# Altium PCB usb_io_v3_brd.PcbDoc
Units mil, origin at the board's own origin, x right, y up, seen from the top; angles counter-clockwise.
Board outline 1476 x 1324 mil, 2 copper layers (Top Layer, Bottom Layer), stack 62.249 mil thick; 45 components, 23 nets, 133 pads, 100 vias.
Unrouted connection lines stored in the file: 2.
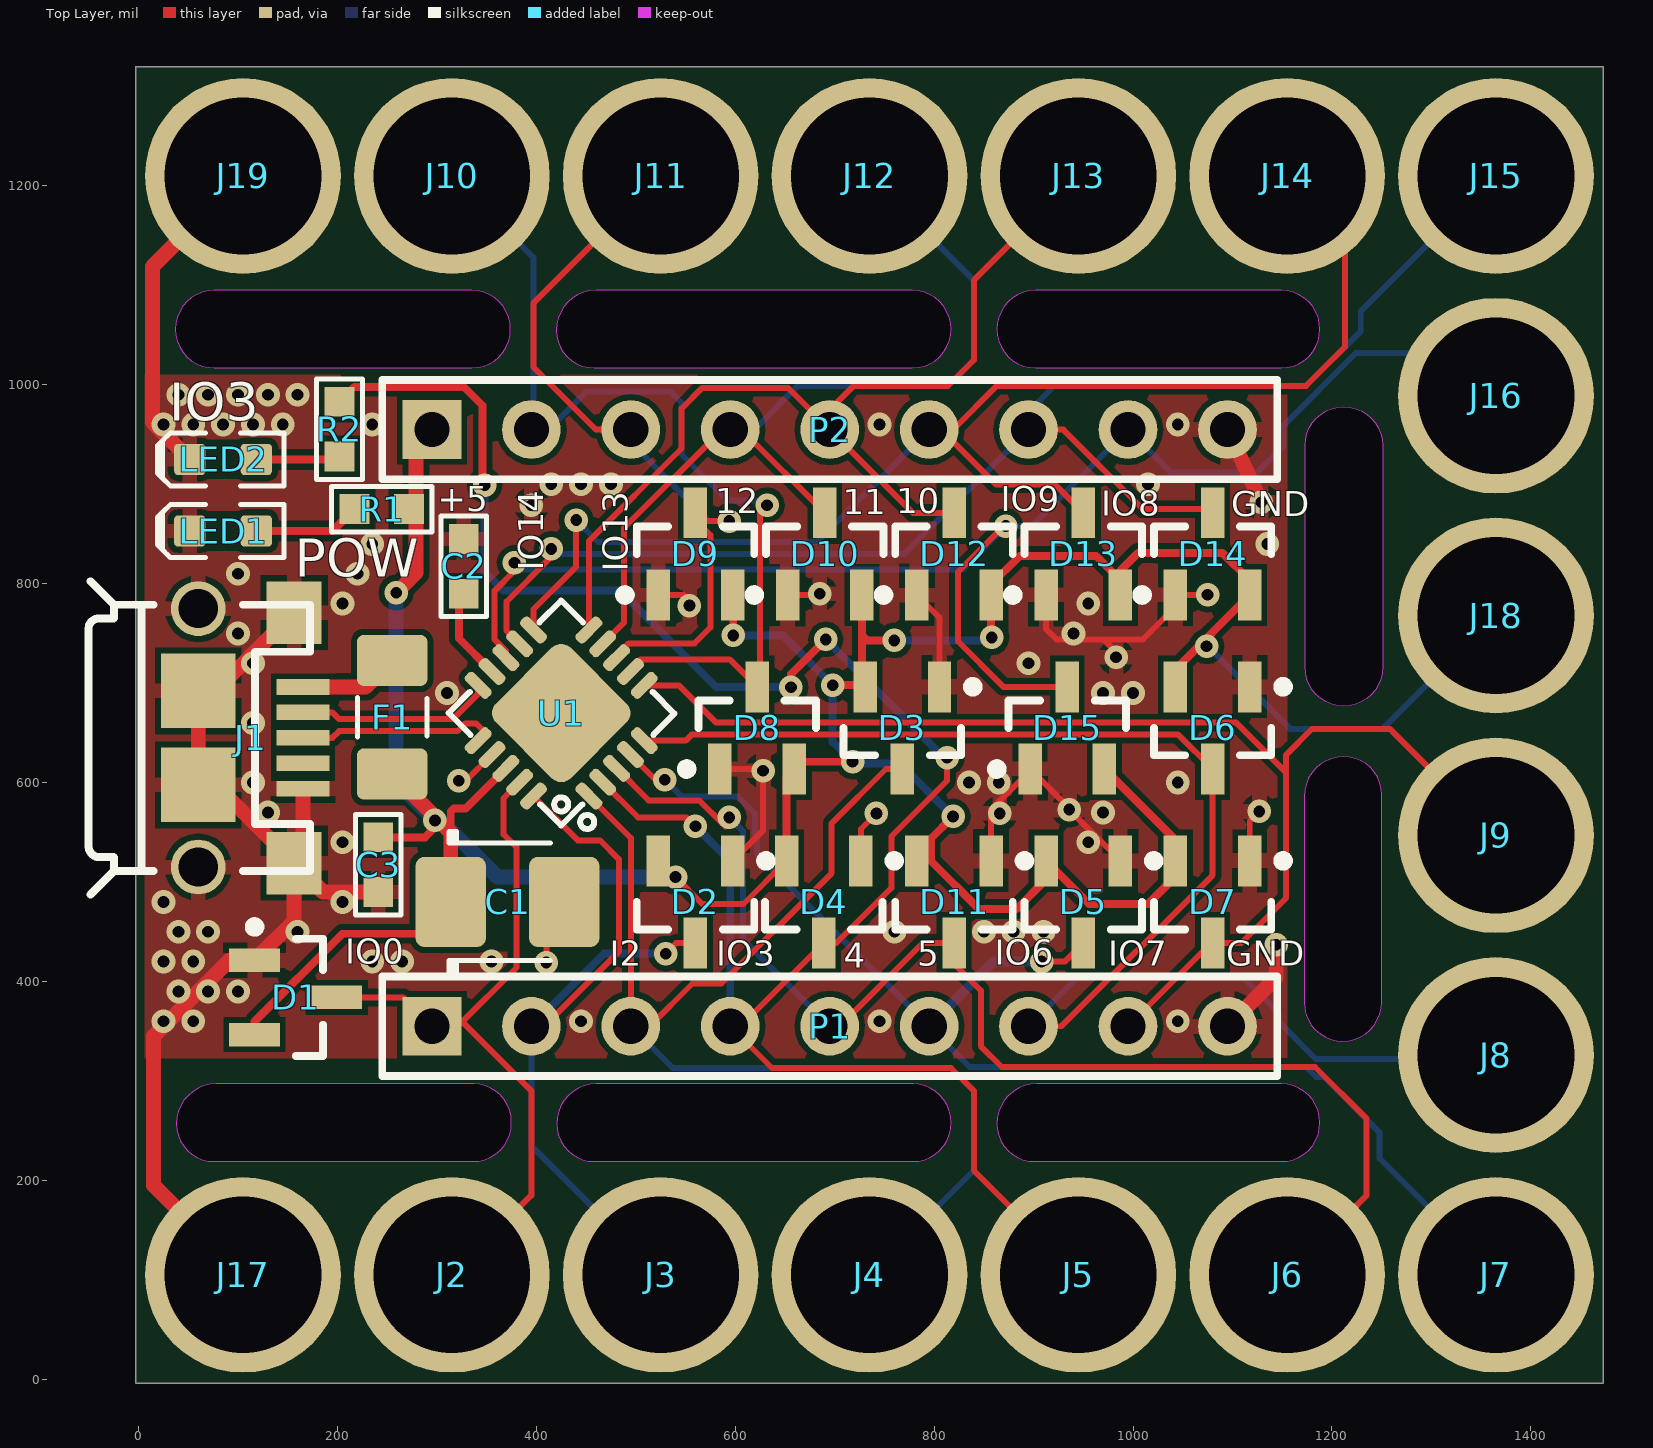
[diagram p0: Top Layer view]
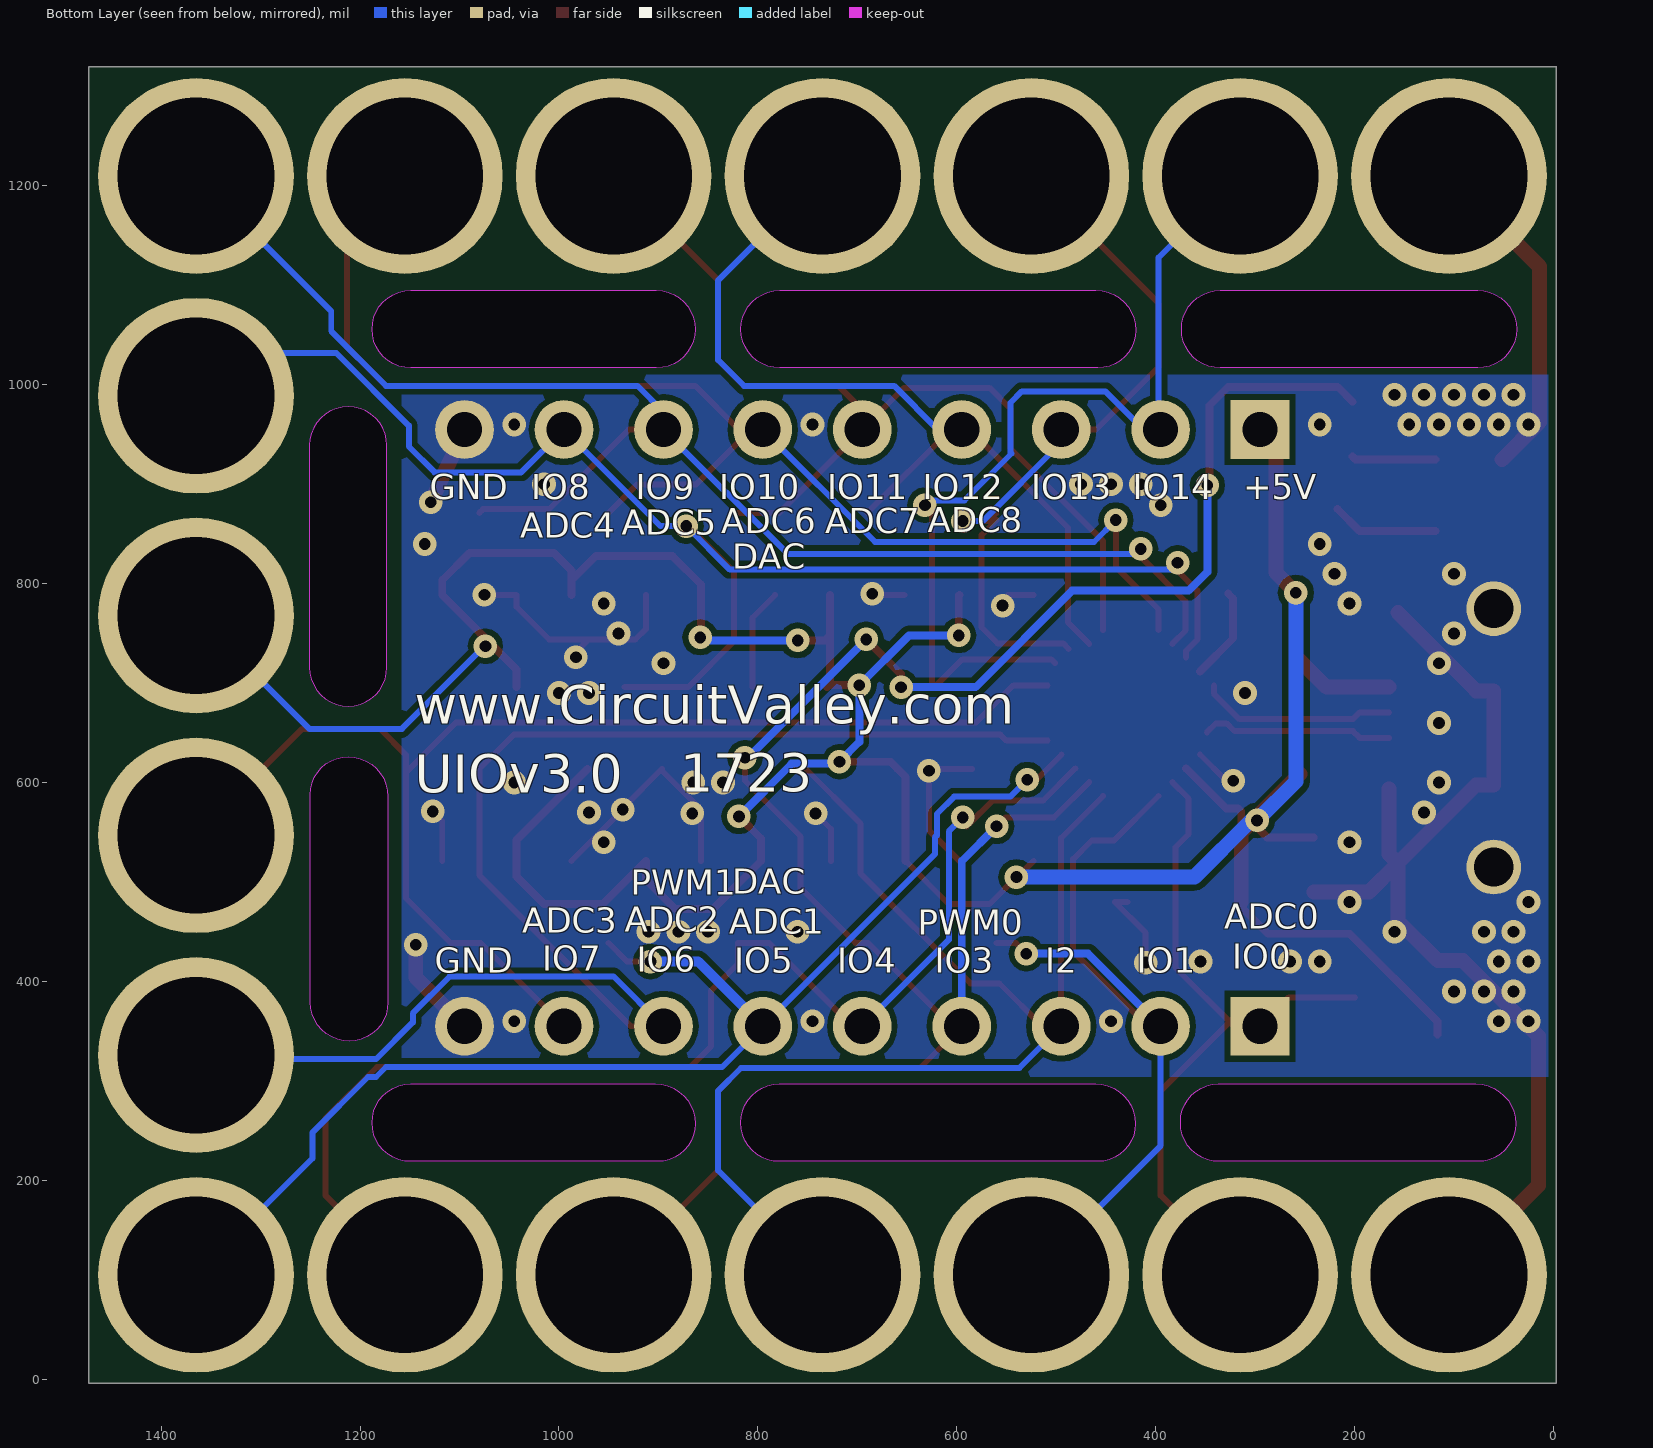
[diagram p1: Bottom Layer view, seen from below]

## Layer stack, top to bottom
Top Solder: solder mask 0.4, Solder Resist, Dk 3.5
Top Layer: signal copper 1.4
Dielectric 1: dielectric 59.4488, FR-4, Dk 4.8
Bottom Layer: signal copper 1.4
Bottom Solder: solder mask 0.4, Solder Resist, Dk 3.5

## Board outline
-3,-4 -3,1320 1473,1320 1473,-4
cut-out: 460,1095 ccw(c460,1055) 420,1055 ccw(c458,1055) 458,1017 778,1017 ccw(c778,1056) 817,1056 ccw(c778,1056) 778,1095
cut-out: 460.33,297 ccw(c460.33,257) 420.33,257 ccw(c458.33,257) 458.33,219 778.33,219 ccw(c778.33,258) 817.33,258 ccw(c778.33,258) 778.33,297
cut-out: 902,1095 ccw(c902,1056) 863,1056 ccw(c902,1056) 902,1017 1149,1017 ccw(c1149,1056) 1188,1056 ccw(c1149,1056) 1149,1095
cut-out: 1149,219 ccw(c1149,258) 1188,258 ccw(c1149,258) 1149,297 903,297 ccw(c903,257) 863,257 ccw(c901,257) 901,219
cut-out: 1250,588 ccw(c1212,588) 1212,626 ccw(c1212,586) 1172,586 1172,379 ccw(c1211,379) 1211,340 ccw(c1211,379) 1250,379
cut-out: 1251,716 cw(c1212,716) 1212,677 cw(c1212,716) 1173,716 1173,939 cw(c1212,939) 1212,978 cw(c1212,939) 1251,939
cut-out: 78,297 ccw(c78,257) 38,257 ccw(c76,257) 76,219 336,219 ccw(c336,258) 375,258 375,259 ccw(c337,259) 337,297
cut-out: 76,1095 ccw(c76,1056) 37,1056 ccw(c76,1056) 76,1017 335,1017 ccw(c335,1056) 374,1056 ccw(c335,1056) 335,1095

## Design rules (kind name [scope] priority, off if disabled: settings)
Clearance [All] p1: gap=6
ComponentClearance [All] p1: gap=10 collisioncheckmode=3 verticalgap=6 showdistances=FALSE
DiffPairsRouting [All] p1: maxlimit=10 minlimit=6 mostfreqgap=6 toplayer_minwidth=6 toplayer_maxwidth=25 toplayer_prefwidth=8 bottomlayer_minwidth=6 bottomlayer_maxwidth=25 bottomlayer_prefwidth=8 maxuncoupledlength=500
PolygonConnect [All] p1: connectstyle=Relief reliefconductorwidth=15 reliefentries=4 polygonreliefangle="90 Angle" airgapwidth=6
RoutingVias [All] p1: holewidth=11.81 width=15.75 viastyle="Through Hole" minholewidth=11.81 minwidth=11.81 maxholewidth=196.85 maxwidth=196.85
SolderMaskExpansion [All] p1: expansion=4
Width [All] p1: maxlimit=250 minlimit=6 preferedwidth=8
28 further rules are at their usual default settings.

## Classes and differential pairs
differential pair USB: +USB_P -USB_N

## Components (designator, comment, footprint, x,y, rotation, side; value= is the part's Value field where it differs from the comment)
C1 "10µ" CAPMP3528X210N 371,480 r0 top
C2 "0.47uf" 0603C-GENERIC 327,845 r270 top
C3 "0.1uf" 0603C-GENERIC 241,490 r90 top
D1 "BAT54S" SOT23_N 158,384 r0 top
D2 "BAT54S" SOT23_N 560,480 r270 top
D3 "BAT54S" SOT23_N 768,655 r270 top
D4 "BAT54S" SOT23_N 689,480 r270 top
D5 "BAT54S" SOT23_N 950,480 r270 top
D6 "BAT54S" SOT23_N 1080,655 r270 top
D7 "BAT54S" SOT23_N 1080,480 r270 top
D8 "BAT54S" SOT23_N 622,655 r90 top
D9 "BAT54S" SOT23_N 560,830 r90 top
D10 "BAT54S" SOT23_N 690,830 r90 top
D11 "BAT54S" SOT23_N 820,480 r270 top
D12 "BAT54S" SOT23_N 820,830 r90 top
D13 "BAT54S" SOT23_N 950,830 r90 top
D14 "BAT54S" SOT23_N 1080,830 r90 top
D15 "BAT54S" SOT23_N 933.9,655 r90 top
F1 "0ZCJ0050FF2G" RESC3216N 255,665.8 r270 top
J1 "Micro-USB-B" 10118193-0001lfc 60,645 r270 top
J2 "4mm" header_4mm_drill 315,105 r180 top
J3 "4mm" header_4mm_drill 525,105 r0 top
J4 "4mm" header_4mm_drill 735,105 r0 top
J5 "4mm" header_4mm_drill 945,105 r0 top
J6 "4mm" header_4mm_drill 1155,105 r0 top
J7 "4mm" header_4mm_drill 1365,105 r0 top
J8 "4mm" header_4mm_drill 1365,326 r90 top
J9 "4mm" header_4mm_drill 1365,547 r90 top
J10 "4mm" header_4mm_drill 315,1210 r180 top
J11 "4mm" header_4mm_drill 525,1210 r0 top
J12 "4mm" header_4mm_drill 735,1210 r0 top
J13 "4mm" header_4mm_drill 945,1210 r0 top
J14 "4mm" header_4mm_drill 1155,1210 r0 top
J15 "4mm" header_4mm_drill 1365,1210 r0 top
J16 "4mm" header_4mm_drill 1365,989 r0 top
J17 "4mm" header_4mm_drill 105,105 r0 top
J18 "4mm" header_4mm_drill 1365,768 r90 top
J19 "4mm" header_4mm_drill 105,1210 r0 top
LED1 "Yellow" LED-0603-YELLOW 85,853 r180 top
LED2 "Yellow" LED-0603-YELLOW 85,925 r180 top
P1 "Header 9" HDR1X9 295,355 r0 top
P2 "Header 9" HDR1X9 295,955 r0 top
R1 "330R" 0603R-2K2 217,875 r0 top
R2 "330R" 0603R-2K2 202,928 r90 top
U1 "PIC16(L)F1459-I/GZ" UQFN20_4x4 425,670 r135 top

## Footprints (in the part's own frame and the unit in brackets; to place one, negate y for a bottom-side part, rotate by r counter-clockwise, add the part's x,y. Pads: shape width x height; smd on the part's side, far side on the other; paste and mask are expansions set on the pad)
0603C-GENERIC [mil] "CAPACITOR 0603"
  rect 30x30 smd: 1(0,0) 2(55,0)
  silkscreen extent -23,-23 78,23, body extent -4,-15 59,15, height 19
0603R-2K2 [mil] "RESISTOR 0603"
  rect 30x30 smd: 1(0,0) 2(55,0)
  silkscreen extent -23,-23 78,23, body extent -4,-15 59,15, height 20
10118193-0001lfc [mm]
  rect 0.4x1.35 smd: 1(-1.3,2.675) 2(-0.65,2.675) 3(0,2.675) 4(0.65,2.675) 5(1.3,2.675)
  round 1.4 hole 1: 6(-3.3,0) 9(3.3,0)
  rect 1.6x1.4 smd: 6(-3.2,2.45) 9(3.2,2.45)
  rect 1.9x1.9 smd: 7(-1.2,0) 8(1.2,0)
  silkscreen extent -4,-2.8 4,2.85, body extent -3.93,-2.76 3.93,2.9, height 2.81
CAPMP3528X210N [mm] "Molded body capacitor, Body 3.5x2.8mm, 1210, IPC Nominal settings"
  round 0.254 on Mech14: 0(0,0)
  rrect25% 1.8x2.3 smd: 1(-1.45,0) 2(1.45,0)
  Top Layer pour cut-out: -0.508,1.27 0.508,1.27 0.508,-1.27 -0.508,-1.27
  silkscreen extent -1.5,-1.8 1.1,1.8, body extent -1.75,-1.4 1.75,1.4, height 2.1
HDR1X9 [mm] "Connector; Header; 9 Position"
  rect 1.5x1.5 hole 0.9: 1(0,0)
  round 1.5 hole 0.9: 2(2.54,0) 3(5.08,0) 4(7.62,0) 5(10.16,0) 6(12.7,0) 7(15.24,0) 8(17.78,0) 9(20.32,0)
  silkscreen extent -1.27,-1.27 21.59,1.27
header_4mm_drill [mm]
  round 5 hole 4: 1(0,0)
LED-0603-YELLOW [mm]
  round 0.254 on Mech14: 0(0,0)
  rrect25% 0.8x0.8 smd: A(-0.85,0) K(0.85,0)
  Top Layer pour cut-out: -0.5,0.5 0.5,0.5 0.5,-0.5 -0.5,-0.5
  silkscreen extent -1.55,-0.67 1.68,0.67, body extent -0.8,-0.4 0.8,0.4, height 0.75
RESC3216N [mm] "Chip Resistor, Body 3.2x1.6mm, 1206, IPC Medium Density"
  round 0.508 on Mech14: 0(0,0)
  rrect25% 1.3x1.8 smd: 1(-1.45,0) 2(1.45,0)
  silkscreen extent -0.51,-0.89 0.51,0.89, body extent -1.62,-0.82 1.63,0.83, height 0.69
SOT23_N [mm] "SOT23, 3-Leads, Body 2.9x1.3mm, Pitch 0.95mm, Lead Span 2.3mm, IPC Medium Density"
  rect 1.3x0.6 smd: 1(-1.05,0.95) 2(-1.05,-0.95) 3(1.05,0)
  silkscreen extent -1.17,-1.5 0.7,1.92, body extent -0.7,-1.5 0.7,1.5, height 1.1
UQFN20_4x4 [mm]
  rrect70% 0.8x0.3 smd: 1(-2,1) 2(-2,0.5) 3(-2,0) 4(-2,-0.5) 5(-2,-1) 11(2,-1) 12(2,-0.5) 13(2,0) 14(2,0.5) 15(2,1)
  rrect70% 0.3x0.8 smd: 6(-1,-2) 7(-0.5,-2) 8(0,-2) 9(0.5,-2) 10(1,-2) 16(1,2) 17(0.5,2) 18(0,2) 19(-0.5,2) 20(-1,2)
  rrect25% 2.7x2.7 smd: 21(0,0)
  silkscreen extent -2.62,-2.03 2.03,2.03, body extent -2.02,-2.02 2.02,2.02, height 0.81

## Part data
C1: library part CAPT_47u_1210_6V3, "Capacitor SMD Tantalum 47uF 20% 6.3V 1210"
C2 C3: library part 0603C-10UF-6V3-X5R-MUR, "CAPACITOR 0603 CERAMIC"
D1 D2 D3 D4 D5 D6 D7 D8 D9 D10 D11 D12 D13 D14 D15: "Schottky Barrier Double Diode"
F1: library part FUSE-GENERIC, "GENERIC FUSE"
J2 J3 J4 J5 J6 J7 J8 J9 J10 J11 J12 J13 J14 J15 J16 J17 J18 J19: library part Banana_4mm
LED1 LED2: library part LED_SMD_Yellow_0603_150mcd, "LED 0603 SMD Yellow 590nm 150mcd 20mA"
P1 P2: "Header, 9-Pin"
R1 R2: library part 0603R-2K2, "GENERIC RESISTOR 0603"

## Via types
v1: diameter 24, hole 12, Top Layer to Bottom Layer, tented both sides, 61 vias
v2: diameter 23.62, hole 11.81, Top Layer to Bottom Layer, tented both sides, 39 vias

## Nets (pads, with @x,y where several pads share a name; then routed paths per layer and width w, separated by ;. In a path a pad name is that pad's centre, name@x,y a point inside that pad or via, vN(x,y) a via of type N, cw(c..) or ccw(c..) an arc to the next point about the centre after c; other vN are vias at no path point)
+5V: C1.1 C3.2 D1.2 D2.2 D3.2 D4.2 D5.2 D6.2 D7.2 D8.2 D9.2 D10.2 D11.2 D12.2 D13.2 D14.2 D15.2 F1.2 J18.1 P2.1 R1.2 U1.18 | length 3627.3
  Top Layer w6: D2.2 538.94,505 v2(540,505) 567,478 608.26,478 D4.2
  Top Layer w8: D1.2 116.66,359.66 205,448 287,448 313.91,474.91 C1.1 ; C3.2 288,545 v2@303.35,560.35 ; 313.91,549.8 313.91,570.91 317,574 329,574 U1.18 ; D9.2 598,788.06 v2(598,748) ; D4.2 651.6,605.86 D8.2 666.74,621 v2(718,621) ; v2(698,698) D3.2@728.94,698 ; D10.2 727.4,748 ; D3.2 D3.2@728.94,698 ; v2(760,743) 732.4,743 727.4,748 ; v2(819,566) 796.66,543.66 796.66,521.34 845,473 883,473 912.6,502.6 D5.2 955.94,478 1015,478 1042.6,505.6 D7.2 1042.6,542.36 D15.2 ; v2(858,746) 857.4,746.6 D12.2 857.4,799.4 886,828 963,828 D13.2@987.4,803.6 ; D13.2 D13.2@987.4,803.6 ; D6.2 1042.6,713.86 D14.2 1117.4,803.6 1090,831 1005,831 987.4,813.4 D13.2@987.4,803.6 ; 727.4,748 727.4,699.54 D3.2@728.94,698
  Top Layer w15: F1.2 303.35,560.35 313.91,549.8 C1.1 ; v2(259,791) 279,811 279,939 P2.1
  Bottom Layer w6: v2(1074,737) 1075,737 1158,654 1251,654 J18.1
  Bottom Layer w8: v2(598,748) 648,748 v2(698,698) 698,641 v2(718,621) ; v2@718,619 766,619 v2(819,566) ; v2(760,743) 855,743 v2(858,746)
  Bottom Layer w15: v2(259,791) 259,601 v2(298,562) 304,562 361,505 v2(540,505)
GND: C1.2 C2.1 C3.1 D1.1 D2.1 D3.1 D4.1 D5.1 D6.1 D7.1 D8.1 D9.1 D10.1 D11.1 D12.1 D13.1 D14.1 D15.1 J1.5 J1.6 J1.7 J1.8 J1.9 J17.1 J19.1 LED1.K LED2.K P1.9 P2.9 U1.17 | length 2625.2
  Top Layer w6: v2(322,602) 329.16,602 U1.17 ; v2@395,878 v2(395,879) ; v2(410,419) 410,449 441,480 C1.2 ; D9.1 548.34,788.66 554,783 v2(554,778) ; D8.1 628,613.66 v2(628,612) 628,551.94 D2.1 ; D10.1 683.66,788.66 v2(685,790) ; D4.1 726.4,553.4 v2(742,569) ; D12.1 805.4,765.86 D3.1 ; D11.1 v2@857.4,569 ; v2@857.4,573.15 861.85,573.15 v2(866,569) ; v2@859.62,575.38 D15.1@896.49,612.25 ; D15.1 935.87,574.28 v2(935.87,572.87) D5.1 ; D13.1 912.6,754.4 923,744 970,744 ; v2(983,726) 983,731 970,744 ; v2(1075,789) 1074.66,788.66 D14.1 1042.6,776.6 1010,744 970,744 ; D7.1 1117.4,561.4 v2(1127,571)
  Top Layer w15: LED2.K 14,962.54 14,1119 J19.1 ; J17.1 15,195 15,345 91,421 116.26,421 D1.1 156.46,461.2 J1.9@156.46,519.02 ; J1.6@156.46,770.98 77.72,692.24 J1.7 J1.8 77.72,597.76 J1.9@156.46,519.02 ; J1.5 165.32,527.87 J1.9@156.46,519.02 ; C3.1 185.47,490 J1.9@156.46,519.02 ; P1.9 1144,404 v2(1144,437) ; P2.9 v2(1129,882)
  other v1: 25,360 55,360 445,360 745,360 1045,360 40,390 70,390 100,390 25,420 55,420 235,420 265,420 355,420 40,450 70,450 160,450 760,450 850,450 880,450 910,450 25,480 205,480 205,540 955,540 130,570 970,570 115,600 835,600 865,600 1045,600 115,660 310,690 970,690 1000,690 115,720 895,720 100,750 940,750 205,780 955,780 100,810 220,810 235,840 1135,840 415,900 445,900 475,900 1015,900 25,960 55,960 85,960 115,960 145,960 235,960 745,960 1045,960 40,990 70,990 100,990 130,990 160,990
I2: D3.3 J4.1 P1.3 U1.1 | length 1258.8
  Top Layer w6: U1.1 495,544.32 P1.3 514,355 557,398 586,398 697,509 697,559 751.66,613.66 D3.3
  Bottom Layer w6: P1.3 537,313 817,313 840,290 840,210 J4.1
IO0: D1.3 J2.1 P1.1 U1.19 | length 728
  Top Layer w6: D1.3 266,384 P1.1 ; P1.1@310,355 320,365 395,290 395,185 J2.1 ; P1.1@321,355 380,414 380,535 367,548 367,584.16 U1.19
IO1: D2.3 J3.1 P1.2 U1.20 | length 827.7
  Top Layer w6: P1.2 408,355 483,430 483,523 464,542 441.64,542 U1.20 ; v2(530,428) 540.66,438.66 D2.3
  Bottom Layer w6: P1.2 395,235 J3.1
  Bottom Layer w8: P1.2 468,428 v2(530,428)
IO3: D4.3 J5.1 P1.4 R2.2 U1.2 | length 2117.1
  Top Layer w6: U1.2 502.16,565 551,565 v2(560,556) ; v2(813,625) 813,601.87 757,545.87 757,494 701.66,438.66 D4.3 605.34,355 P1.4 637,313 817,313 840,290 840,210 J5.1
  Top Layer w8: R2.2 217,998 327,998 346,979 346,901 v2(348,899) ; v2(656,696) 656,709 v2(691,744)
  Bottom Layer w8: v2(348,899) 348,812 367,793 484,793 581,696 v2(656,696) ; v2(560,556) 595,521 P1.4 ; v2(691,744) 810,625 v2(813,625)
IO4: D11.3 J6.1 P1.5 U1.3 | length 1275.4
  Top Layer w6: U1.3 513,582 563.93,582 v2@587.46,558.46 ; v2@590,555.93 594,559.93 v2(594,565) ; P1.5 705,355 788.66,438.66 D11.3 820,418 847,391 847,335 868,314 1183,314 1235,262 1235,185 J6.1
  Bottom Layer w6: v2(594,565) 608,551 608,442 P1.5
IO5: D5.3 J7.1 P1.6 U1.4 | length 1314.5
  Top Layer w6: U1.4 519.84,603 v2(529,603) ; v2(908,420) 931.34,420 D5.3
  Bottom Layer w6: v2(529,603) 546.19,585.81 602.62,585.81 620,568.43 620,547 622,545 622,528 P1.6 836,314 1174,314 1184,304 1192,304 1248,248 1248,222 J7.1
  Bottom Layer w10: P1.6 860,420 v2(908,420)
IO6: D6.3 J8.1 P1.7 U1.5 | length 1475
  Top Layer w6: U1.5 550.16,642.16 556.25,648.25 955.76,648.25 1045.41,648.25 D6.3 1080,507 928,355 P1.7
  Bottom Layer w6: P1.7 945,405 1110,405 1147,368 1147,359 1184,322 1361,322 J8.1
IO7: D7.3 J9.1 P1.8 U1.6 | length 1304.4
  Top Layer w6: U1.6 543.16,697.84 580.75,660.25 1103.75,660.25 1154,610 ; P1.8 1078.66,438.66 D7.3 1108.66,438.66 1154,484 1154,610 ; J9.1 1258,654 1180,654 1154,628 1154,610
IO8: D15.3 J16.1 P2.8 U1.13 | length 1520
  Top Layer w6: U1.13 369.32,732.44 358,743.76 358,793 378,813 v2(378,821) ; v2(872,858) 870,858 824,812 824,742 869.66,696.34 D15.3
  Bottom Layer w6: v2(378,821) 384.81,814.19 828.19,814.19 v2(872,858) 898,858 P2.8 1038,912 1125,912 1151,938 1151,959.03 1223.99,1032.01 1321.99,1032.01 J16.1
IO9: D14.3 J15.1 P2.7 U1.12 | length 1470.9
  Top Layer w6: U1.12 370,752.84 370,782 415,827 v2(415,835) ; P2.7 930,955 1010,875 1076.34,875 D14.3
  Bottom Layer w6: v2(415,835) 420,830 770,830 P2.7 895,973 921,999 1174,999 1229,1054 1229,1074 J15.1
IO10: D13.3 J14.1 P2.6 U1.11 | length 1365.2
  Top Layer w6: U1.11 397.16,774.16 440,817 v2(440,864) ; P2.6 P2.6@807,955 ; D13.3 921.34,900 862,900 P2.6@807,955 ; J14.1 1213,1152 1213,1038 1174,999 863,999 819,955 P2.6@807,955
  Bottom Layer w6: v2(440,864) 462,842 682,842 P2.6
IO11: D12.3 J13.1 P2.5 U1.10 | length 1010
  Top Layer w6: U1.10 452.84,842.84 546,936 546,976 567,997 653,997 P2.5 ; D12.3 778.66,871.34 P2.5 ; J13.1 840,1105 840,1025 814,999 719,999 695,975 P2.5
IO12: D10.3 J12.1 P2.4 U1.9 | length 928.3
  Top Layer w6: U1.9 488,760.84 488,856 587,955 P2.4 606.34,955 D10.3
  Bottom Layer w6: P2.4@595,932 P2.4 619,955 663,999 814,999 840,1025 840,1105 J12.1
IO13: D9.3 J11.1 P2.3 U1.8 | length 762
  Top Layer w6: U1.8@487.44,734.36 493.08,740 559,740 575,756 575,849 D9.3@560,864 ; P2.3 460,955 397,1018 397,1082 J11.1 ; D9.3 568.34,863 v2(594,863)
  Bottom Layer w6: P2.3 495,942 574,863 v2(594,863)
IO14: D8.3 J10.1 P2.2 U1.7 | length 1000
  Top Layer w6: J10.1@315,1166 J10.1 ; P2.2@385,965 P2.2 ; U1.7@501.36,720.44 504.92,724 594.34,724 D8.3 625,699.34 625,872 v2(632,879)
  Bottom Layer w6: J10.1 397,1128 397,957 P2.2 412,955 450.53,993.53 534.47,993.53 546,982 546,932 545,931 592.19,883.81 627.19,883.81 v2(632,879)
NetC2_2: C2.2 U1.14 | length 94.1
  Top Layer w8: C2.2 322,785 322,745.16 U1.14
NetF1_1: F1.1 J1.1 | length 100.7
  Top Layer w15: J1.1 228.3,696.18 F1.1
NetLED1_A: LED1.A R1.1 | length 107.6
  Top Layer w8: LED1.A 195,853 R1.1
NetLED2_A: LED2.A R2.1 | length 84.8
  Top Layer w8: LED2.A 199,925 R2.1
USB_N: J1.2 U1.15 | length 198
  Top Layer w6: J1.2 194.89,670.59 201.69,663.8 315.8,663.8 341.48,689.48 U1.15
USB_P: J1.3 U1.16 | length 193
  Top Layer w6: J1.3 194.89,645 201.69,651.8 320.77,651.8 328.63,659.65 339.35,659.65 U1.16@348.5,650.5
pads on no net: C1.0 F1.0 J1.4 LED1.0 LED2.0 U1.21

## Polygon pours and split planes (outlines as drawn)
GND on Bottom Layer "Top Layer-No Net" (solid, pour order 2): 5,1010 5,304 19,304 1158,304 1158,1010
GND on Top Layer "Top Layer-No Net" (solid, pour order 4): 6,1010 6,323 1155,323 1155,1010 6,1010

## Silkscreen, mask and mechanical layers (free items; w line width, h text height)
Top Overlay:
  text "IO3" at 31,964 h38
  text "+5" at 301,873 h25
  text "IO9" at 867,873 h25
  text "12" at 580,871 h25
  text "10" at 762,871 h25
  text "11" at 708,870 h25
  text "IO8" at 967.81,868.51 h25
  text "GND" at 1099,868 h25
  text "IO14" at 407,813 h25 r90
  text "IO13" at 492,812 h25 r90
  text "POW" at 157,807 h38
  text "IO0" at 208,418 h25
  text "IO6" at 861,417 h25
  text "I2" at 474,416 h25
  text "IO3" at 581,416 h25
  text "5" at 783,416 h25
  text "IO7" at 975,416 h25
  text "GND" at 1094,416 h25
  text "4" at 709,414 h25
Bottom Overlay:
  text "+5V" at 312,885 h25
  text "IO14" at 423,885 h25
  text "IO13" at 525,885 h25
  text "IO12" at 634,885 h25
  text "IO11" at 730,885 h25
  text "IO10" at 839,885 h25
  text "IO9" at 923,885 h25
  text "IO8" at 1028,885 h25
  text "GND" at 1130,885 h25
  text "ADC8" at 629,852 h25
  text "ADC7" at 732,851 h25
  text "ADC6" at 837,851 h25
  text "ADC5" at 937,849 h25
  text "ADC4" at 1039,846 h25
  text "DAC" at 826,815 h25
  text "www.CircuitValley.com" at 1145,659 h38
  text "1723" at 878,591 h38
  text "UIOv3.0" at 1145,590 h38
  text "DAC" at 826,488 h25
  text "PWM1" at 928,487 h25
  text "ADC0" at 331,453 h25
  text "ADC2" at 934,450 h25
  text "ADC3" at 1037,449 h25
  text "ADC1" at 829,448 h25
  text "PWM0" at 639,447 h25
  text "IO0" at 323,413 h25
  text "IO7" at 1017,411 h25
  text "IO6" at 922,410 h25
  text "IO1" at 419,409 h25
  text "I2" at 511,409 h25
  text "IO3" at 622,409 h25
  text "IO4" at 720,409 h25
  text "IO5" at 824,409 h25
  text "GND" at 1125,409 h25
Mechanical 1:
  lines w3: 335,1017 ccw(c335,1056) 335,1095 ; 336,219 ccw(c336,258) 336,297 ; 338,1017 76,1017 cw(c76,1056) 76,1095 338,1095 ; 339,219 77,219 cw(c77,258) 77,297 339,297 ; 458,1017 782,1017 ; 458.33,219 782.33,219 ; 459,1017 cw(c459,1056) 459,1095 782,1095 ; 459.33,219 cw(c459.33,258) 459.33,297 782.33,297 ; 778,1017 ccw(c778,1056) 778,1095 ; 778.33,219 ccw(c778.33,258) 778.33,297 ; 1172,378 1172,586 ; 1172,379 ccw(c1211,379) 1250,379 1250,586 ; 1172,587 cw(c1211,587) 1250,587 ; 1251,939 ccw(c1212,939) 1173,939 1173,716 ccw(c1212,716) 1251,716 1251,940 ; -3,1320 0,1320 1473,1320 1473,-4 -3,-4 -3,1320 ; -3,1320 -3,1320 ; 902,1017 cw(c902,1056) 902,1095 1149,1095 cw(c1149,1056) 1149,1017 902,1017 ; 902.33,219 cw(c902.33,258) 902.33,297 1149.33,297 cw(c1149.33,258) 1149.33,219 902.33,219